# Altium PCB MPS_PSU_Eval.PcbDoc
Units mm, origin at the board's own origin, x right, y up, seen from the top; angles counter-clockwise.
Board outline 92 x 27 mm, 4 copper layers (Top Layer, Power/Sig, GND, Bottom Layer), stack 1.57 mm thick; 58 components, 31 nets, 158 pads, 508 vias.
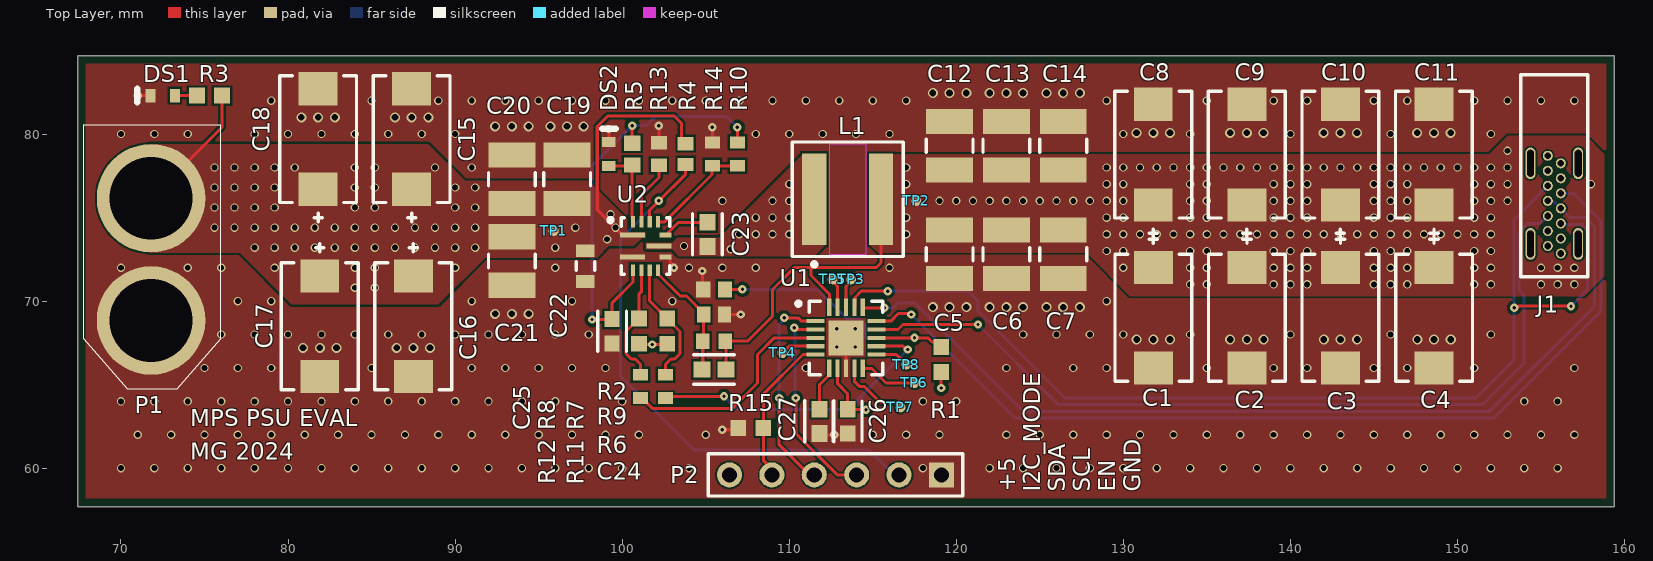
[diagram p0: Top Layer view]
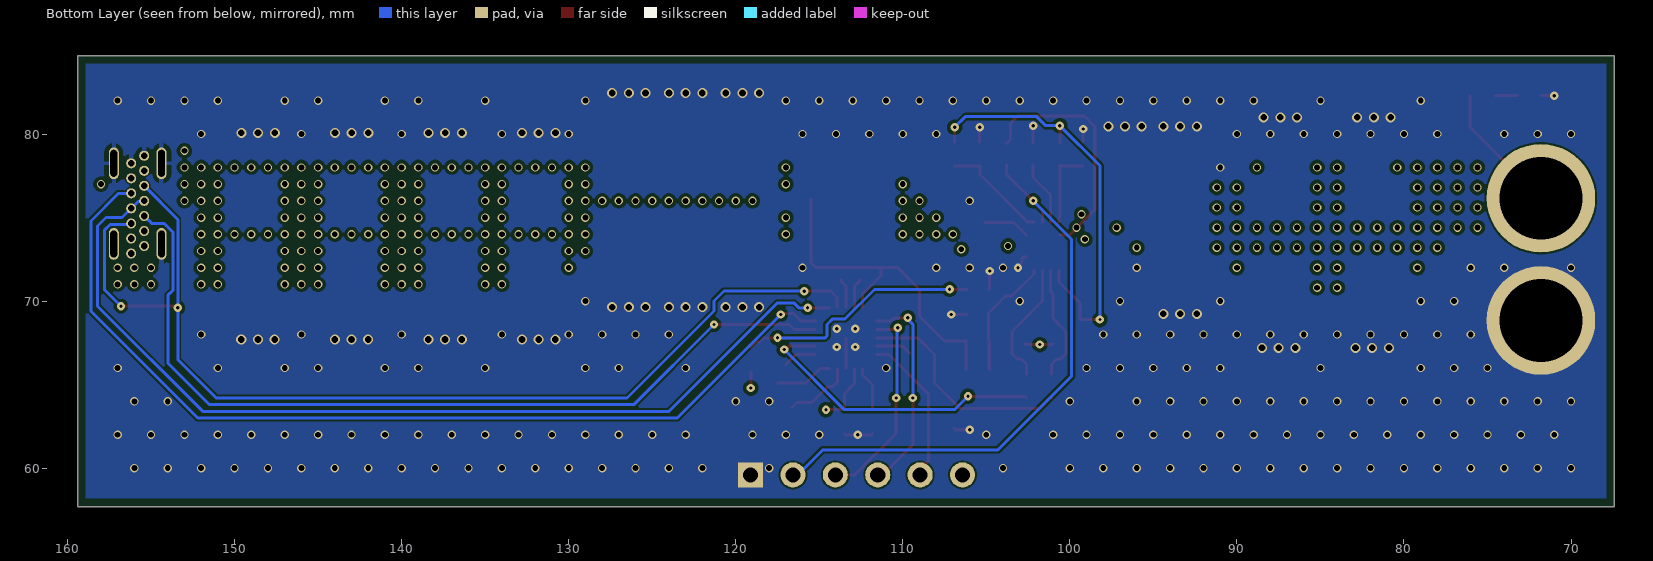
[diagram p1: Bottom Layer view, seen from below]
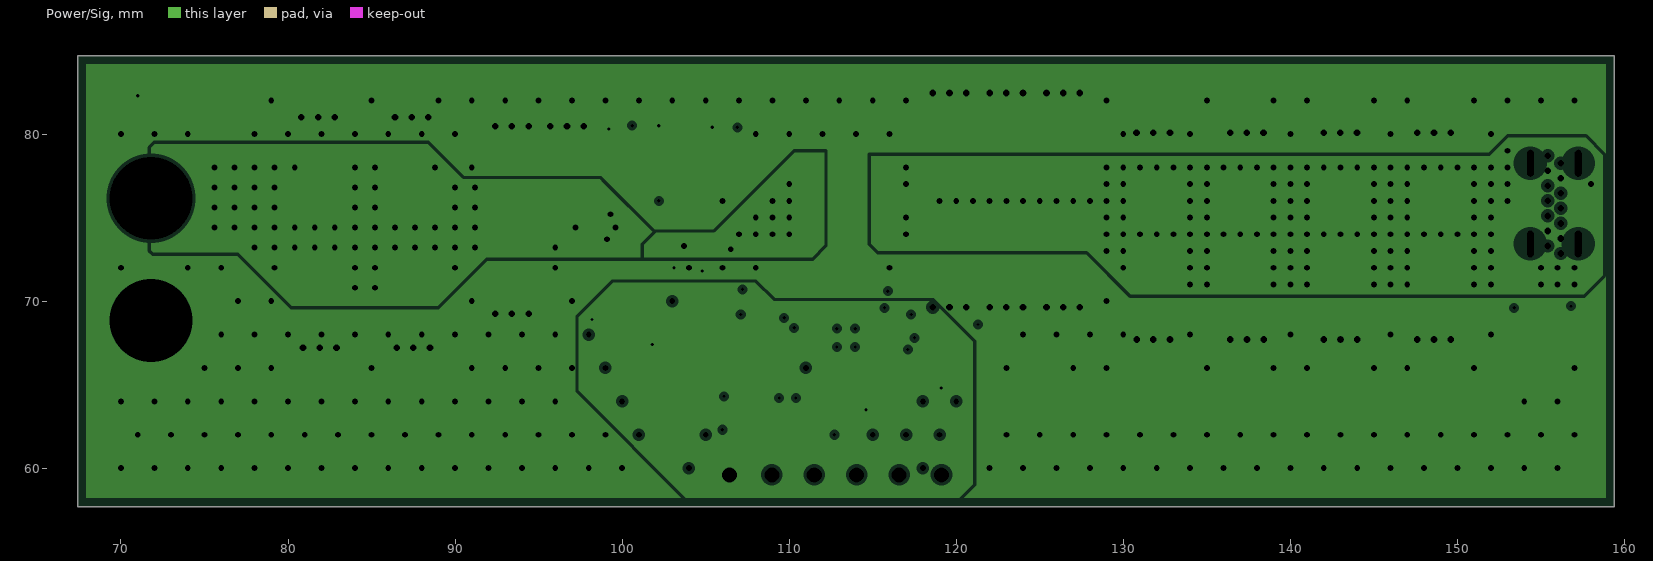
[diagram p2: Power/Sig, clearances drawn from the general rule]
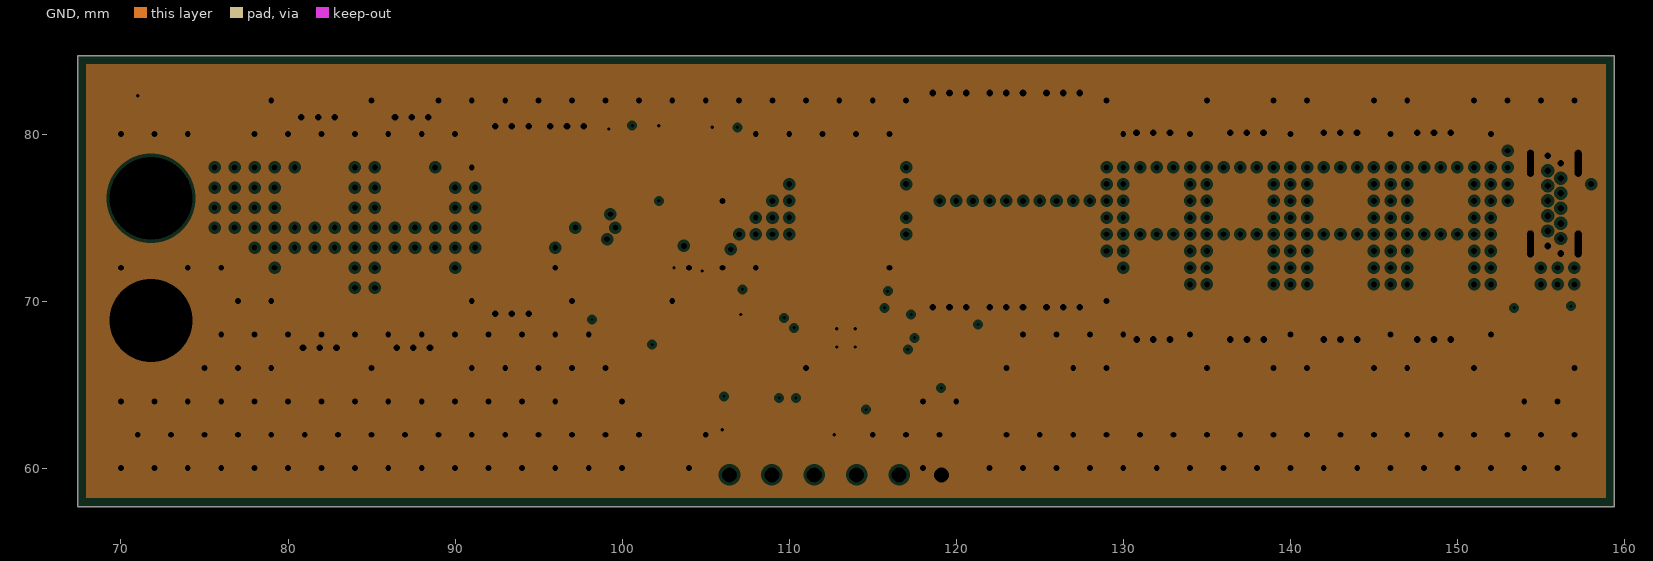
[diagram p3: GND, clearances drawn from the general rule]
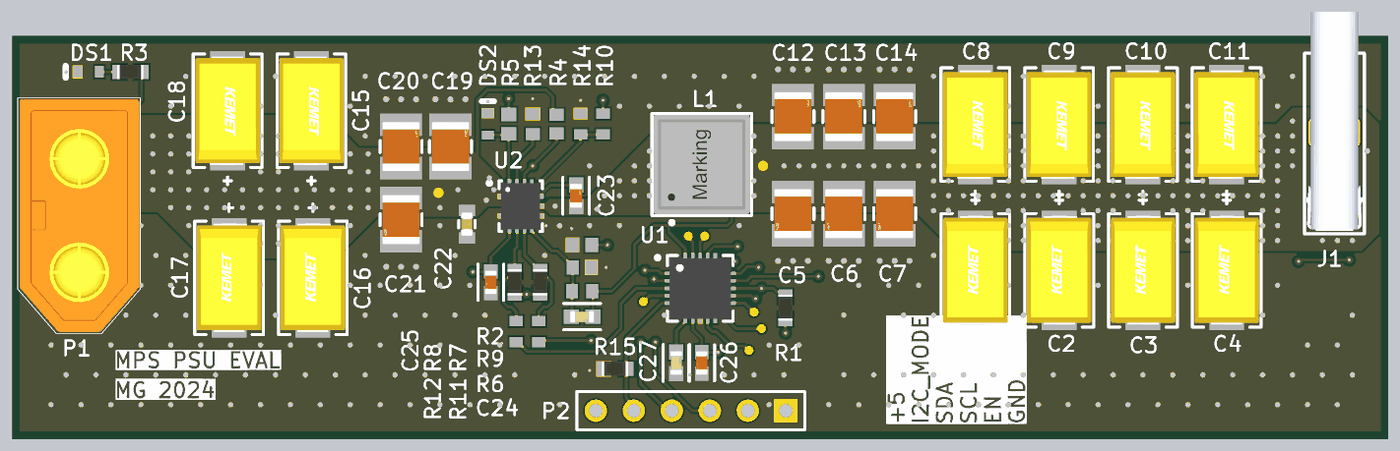
[diagram p4: 3D render of the assembled board from above, using the file's embedded part models]

## Layer stack, top to bottom
Top Solder: solder mask 0.0102, Solder Resist, Dk 3.5
Top Layer: signal copper 0.0356
Dielectric 2: prepreg 0.0994, PP-006, Dk 4.1
Power/Sig: plane copper 0.0175, net GND
Core 1: core 1.265, FR-4, Dk 4.8
GND: plane copper 0.0175, net GND
Dielectric 3: prepreg 0.0994, PP-006, Dk 4.1
Bottom Layer: signal copper 0.0356
Bottom Solder: solder mask 0.0102, Solder Resist, Dk 3.5

## Board outline
67.4,57.7 159.4,57.7 159.4,84.7 67.4,84.7

## Design rules (kind name [scope] priority, off if disabled: settings)
Clearance [All] p1: gap=0.127 ignorepadtopadclearanceinfootprint=FALSE except(0: SMDPad-Hole THPad-Hole Via-Hole Fill-Hole Poly-Hole Region-Hole Text-Hole; 0.1: Arc-Arc Arc-Track Track-Track THPad-Fill THPad-Poly THPad-Region; 0.2: Arc-SMDPad Arc-Via Track-SMDPad Track-Via Via-Fill Via-Poly Via-Region; 0.25: THPad-THPad; 0.254: Arc-Text Arc-Hole Track-Text Track-Hole SMDPad-THPad SMDPad-Via SMDPad-Text THPad-Via THPad-Text Via-Via Via-Text Fill-Text Poly-Text Region-Text Text-Text)
HoleSize [All] p1: absolutevalues=TRUE maxlimit=5 minlimit=0.025 maxpercent=80.000 minpercent=20.000
MinimumSolderMaskSliver [All] p1: minsoldermaskwidth=0.1
PlaneClearance [All] p1: clearance=0.2
PlaneConnect [All] p1: planeconnectstyle=Direct reliefexpansion=0.508 reliefentries=4 reliefconductorwidth=0.254 reliefairgap=0.254
PolygonConnect [All] p1: connectstyle=Direct reliefconductorwidth=0.254 reliefentries=4 polygonreliefangle="90 Angle" airgapwidth=0.254
RoutingVias [All] p1: holewidth=0.2 width=0.5 viastyle="Through Hole" minholewidth=0.2 minwidth=0.5 maxholewidth=0.711 maxwidth=1.27
SilkToSolderMaskClearance [IsPad] p1: minsilkscreentomaskgap=0.15 clearancetoexposedcopper=TRUE
SolderMaskExpansion SolderMaskExpansionVia [IsVia] p1: expansion=0.102 istentingtop=TRUE
SolderMaskExpansion [All] p2: expansion=0.04 istentingtop=FALSE
SupplyNets "Schematic Supply Nets_1" [InNet('GND')] p1: voltage=0.000
SupplyNets "Schematic Supply Nets" [InNet('+5')] p2: voltage=0.000
Width [All] p1: maxlimit=0.5 minlimit=0.127 preferedwidth=0.18 minimp=50.000000 maximp=50.000000 favimp=50.000000
25 further rules are at their usual default settings.

## Components (designator, comment, footprint, x,y, rotation, side; value= is the part's Value field where it differs from the comment)
C1 "47uF 35V" FP-T491X476K035AT-MFG 131.8,69 r90 top
C2 "47uF 35V" FP-T491X476K035AT-MFG 137.4,69 r90 top
C3 "47uF 35V" FP-T491X476K035AT-MFG 143,69 r90 top
C4 "47uF 35V" FP-T491X476K035AT-MFG 148.6,69 r90 top
C5 "10uF" FP-1210-L_3_3_0_4-W_2_5_0-IPC_B 119.6,72.8 r270 top
C6 "10uF" FP-1210-L_3_3_0_4-W_2_5_0-IPC_B 123,72.8 r270 top
C7 "10uF" FP-1210-L_3_3_0_4-W_2_5_0-IPC_B 126.4,72.8 r270 top
C8 "47uF 35V" FP-T491X476K035AT-MFG 131.794,78.771 r270 top
C9 "47uF 35V" FP-T491X476K035AT-MFG 137.394,78.771 r270 top
C10 "47uF 35V" FP-T491X476K035AT-MFG 142.994,78.771 r270 top
C11 "47uF 35V" FP-T491X476K035AT-MFG 148.594,78.771 r270 top
C12 "10uF" FP-1210-L_3_3_0_4-W_2_5_0-IPC_B 119.6,79.3 r90 top
C13 "10uF" FP-1210-L_3_3_0_4-W_2_5_0-IPC_B 123,79.3 r90 top
C14 "10uF" FP-1210-L_3_3_0_4-W_2_5_0-IPC_B 126.4,79.3 r90 top
C15 "47uF 35V" FP-T491X476K035AT-MFG 87.5,68.5 r90 top
C16 "47uF 35V" FP-T491X476K035AT-MFG 87.4,79.7 r270 top
C17 "47uF 35V" FP-T491X476K035AT-MFG 81.8,79.7 r270 top
C18 "47uF 35V" FP-T491X476K035AT-MFG 81.9,68.5 r90 top
C19 "10uF" FP-1210-L_3_3_0_4-W_2_5_0-IPC_B 96.7,77.3 r90 top
C20 "10uF" FP-1210-L_3_3_0_4-W_2_5_0-IPC_B 93.4,77.3 r90 top
C21 "10uF" FP-1210-L_3_3_0_4-W_2_5_0-IPC_B 93.4,72.4 r270 top
C22 "100nF" FP-CGA3E-0_3-0_1-IPC_B 97.8,72.1 r270 top
C23 "1uF" FP-0603-L_1_6_0_15-W_0_81-IPC_B 105.1,74 r90 top
C24 "22pF" FP-C0603C-CF-IPC_B 105.5,65.9 r180 top value="22 pF"
C25 "2.2uF" FP-GRM188-0_1-e0_2_0_5-IPC_B 99.4,68.2 r270 top
C26 "2.2uF" FP-GRM188-0_1-e0_2_0_5-IPC_B 113.5,62.8 r270 top
C27 "470nF" FP-C0603C-CF-IPC_B 111.8,62.8 r270 top value="0.47 μF"
DS1 "RED" VISH-TLMX1100_V 72.5,82.3 r180 top
DS2 "RED" VISH-TLMX1100_V 99.2,78.8 r90 top
J1 "UJ20-C-R-G-TH-P14" UJ20-C-R-G-TH-P14 155.8,78.7 r180 top
L1 "74439346056" WE-XHMI_6060_L6.65W6.45H5.8 113.5,76.1 r90 top
P1 "XT60" XT60 71.8,72.5 r270 top
P2 "Header 6" HDR1X6 119.12,59.6 r180 top
R1 "47k" RESC1608X55X30NL15T15#1 119.1,66.5 r270 top
R2 "10k NTC" RESC1608X90X30NL15T20 105.5,70.7 r0 top
R3 "10k" RESC1609X55X30NL15T15 75.3,82.3 r0 top
R4 "300k" RESC1609X50X30NL10T20 103.8,78.8 r90 top
R5 "2.2k" RESC1608X50X30NL20T20 100.6,78.8 r90 top
R6 "100k" RESC1608X55X30NL15T15#2 105.5,67.6 r0 top
R7 "10k" RESC1609X55X30NL15T15 102.7,68.2 r270 top
R8 "10k" RESC1609X55X30NL15T15 101,68.2 r270 top
R9 "11k" RESC1609X50X30NL10T20 105.5,69.2 r180 top
R10 "DNP" RESC1608X55X25NL10T15 106.9,78.8 r90 top
R11 "0R" RESC1608X55X25NL10T15 102.6,64.9 r270 top
R12 "0R" RESC1608X55X25NL10T15 101.1,64.9 r270 top
R13 "64.9k" RESC1608X55X30NL15T15#2 102.2,78.8 r270 top
R14 "0R" RESC1608X55X25NL10T15 105.4,78.8 r270 top
R15 "10k" RESC1609X55X30NL15T15 107.7,62.4 r0 top
TP1 "TESTPOINT" TESTPOINT_0.6 95.9,74.2 r90 top
TP2 "TESTPOINT" TESTPOINT_0.6 117.6,76 r90 top
TP3 "TESTPOINT" TESTPOINT_0.6 113.7,71.3 r90 top
TP4 "TESTPOINT" TESTPOINT_0.6 109.6,66.9 r90 top
TP5 "TESTPOINT" TESTPOINT_0.6 112.6,71.3 r90 top
TP6 "TESTPOINT" TESTPOINT_0.6 117.5,65.1 r90 top
TP7 "TESTPOINT" TESTPOINT_0.6 116.658,63.638 r90 top
TP8 "TESTPOINT" TESTPOINT_0.6 117,66.2 r90 top
U1 "MP5031" QFN-20-MP5031 113.4,67.8 r0 top
U2 "MP2491C" QFN-13-MPS2491C 101.4,73.3 r0 top

## Footprints (in the part's own frame and the unit in brackets; to place one, negate y for a bottom-side part, rotate by r counter-clockwise, add the part's x,y. Pads: shape width x height; smd on the part's side, far side on the other; paste and mask are expansions set on the pad)
FP-0603-L_1_6_0_15-W_0_81-IPC_B [mm]
  rect 1.007x0.968 smd paste+0 mask+0: 1(-0.726,0) 2(0.726,0)
  silkscreen extent -1.23,-0.88 1.23,0.88, body extent -1.48,-0.73 1.48,0.73, height 0.25
FP-1210-L_3_3_0_4-W_2_5_0-IPC_B [mm]
  rect 1.503x2.804 smd paste+0 mask+0: 1(-1.45,0) 2(1.45,0)
  silkscreen extent -0.4,-1.4 0.4,1.4, body extent -2.45,-1.65 2.45,1.65, height 0.25
FP-C0603C-CF-IPC_B [mm]
  rect 1.007x0.958 smd paste+0 mask+0: 1(-0.726,0) 2(0.726,0)
  silkscreen extent -1.23,-0.88 1.23,0.88, body extent -1.48,-0.73 1.48,0.73, height 0.25
FP-CGA3E-0_3-0_1-IPC_B [mm]
  rect 0.756x1.106 smd paste+0 mask+0: 1(-0.925,0) 2(0.925,0)
  silkscreen extent -0.25,-0.55 0.25,0.55, body extent -1.55,-0.8 1.55,0.8, height 0.25
FP-GRM188-0_1-e0_2_0_5-IPC_B [mm]
  rect 0.959x0.912 smd paste+0 mask+0: 1(-0.727,0) 2(0.727,0)
  silkscreen extent -1.21,-0.86 1.21,0.86, body extent -1.46,-0.71 1.46,0.71, height 0.25
FP-T491X476K035AT-MFG [mm]
  rect 1.99x2.33 smd paste+0 mask+0: 1(-3.01,0) 2(3.01,0)
  silkscreen extent -3.8,-2.3 4.95,2.3, body extent -4.13,-2.42 4.13,2.42, height 0.25
HDR1X6 [mm] "Connector; Header; 6 Position"
  rect 1.5x1.5 hole 0.9: 1(0,0)
  round 1.5 hole 0.9: 2(2.54,0) 3(5.08,0) 4(7.62,0) 5(10.16,0) 6(12.7,0)
  silkscreen extent -1.27,-1.27 13.97,1.27
QFN-13-MPS2491C [mm] "QFN, 14-Leads, Body 2,50x2,55mm, Pitch 0,50mm/0,65mm, IPC Medium Density"
  rect 1.5x0.3 smd: 1(-0.775,0.65) 2(-0.775,-0.65) 8(0.8,0)
  rect 0.25x0.7 smd: 3(-0.75,-1.45) 4(-0.25,-1.45) 5(0.25,-1.45) 6(0.75,-1.45) 10(0.75,1.45) 11(0.25,1.45) 12(-0.25,1.45) 13(-0.75,1.45)
  rect 0.7x0.3 smd: 7(1.2,-0.65) 9(1.2,0.65)
  silkscreen extent -2.22,-1.7 1.45,1.7, body extent -1.3,-1.55 1.3,1.55, height 1
QFN-20-MP5031 [mm] "QFN, 20-Leads, Body 4,00x4,00mm, Pitch 0,50mm, Thermal Pad 2,10x2,10mm, IPC Medium Density"
  rect 1.05x0.25 smd: 1(-1.825,1) 2(-1.825,0.5) 3(-1.825,0) 4(-1.825,-0.5) 5(-1.825,-1) 11(1.825,-1) 12(1.825,-0.5) 13(1.825,0) 14(1.825,0.5) 15(1.825,1)
  rect 0.25x1.05 smd: 6(-1,-1.825) 7(-0.5,-1.825) 8(0,-1.825) 9(0.5,-1.825) 10(1,-1.825) 16(1,1.825) 17(0.5,1.825) 18(0,1.825) 19(-0.5,1.825) 20(-1,1.825)
  rect 2.1x2.1 smd: 21(0,0)
  silkscreen extent -2.97,-2.2 2.2,2.2, body extent -2.05,-2.05 2.05,2.05, height 1
RESC1608X50X30NL20T20 [mm] "Chip Resistor, 2-Leads, Body 1.60x0.80mm, IPC Medium Density"
  rect 0.9x1 smd: 1(-0.65,0) 2(0.65,0)
  body extent -0.9,-0.5 0.9,0.5, height 0.5
RESC1608X55X25NL10T15 [mm] "Chip Resistor, 2-Leads, Body 1.70x0.90mm, IPC Medium Density"
  rect 0.7x0.9 smd: 1(-0.7,0) 2(0.7,0)
  body extent -0.85,-0.45 0.85,0.45, height 0.55
RESC1608X55X30NL15T15#1 [mm] "Chip Resistor, 2-Leads, Body 1.75x0.95mm, IPC Medium Density"
  rect 0.95x0.95 smd: 1(-0.75,0) 2(0.75,0)
  body extent -0.87,-0.48 0.87,0.48, height 0.55
RESC1608X55X30NL15T15#2 [mm] "Chip Resistor, 2-Leads, Body 1.60x0.80mm, IPC Medium Density"
  rect 0.8x0.95 smd: 1(-0.675,0) 2(0.675,0)
  body extent -0.87,-0.48 0.87,0.48, height 0.55
RESC1608X90X30NL15T20 [mm] "Chip Resistor, 2-Leads, Body 1.60x0.80mm, IPC Medium Density"
  rect 0.85x0.95 smd: 1(-0.65,0) 2(0.65,0)
  body extent -0.88,-0.48 0.87,0.48, height 0.9
RESC1609X50X30NL10T20 [mm] "Chip Resistor, 2-Leads, Body 1.55x0.85mm, IPC Medium Density"
  rect 0.8x0.95 smd: 1(-0.625,0) 2(0.625,0)
  body extent -0.82,-0.48 0.82,0.48, height 0.5
RESC1609X55X30NL15T15 [mm] "Chip Resistor, 2-Leads, Body 1.75x0.95mm, IPC Medium Density"
  rect 0.95x0.95 smd: 1(-0.75,0) 2(0.75,0)
  body extent -0.87,-0.48 0.87,0.48, height 0.55
TESTPOINT_0.6 [mm]
  round 0.6 smd paste-2539.97: 1(0,0)
UJ20-C-R-G-TH-P14 [mm]
  round 0.6 hole 0.4: A1(-0.39,0.45) A4(-0.39,1.35) A5(-0.39,2.25) A6(-0.39,3.15) A7(-0.39,4.05) A9(-0.39,4.95) A12(-0.39,5.85) B1(0.39,5.4) B4(0.39,4.5) B5(0.39,3.6) B6(0.39,2.7) B7(0.39,1.8) B9(0.39,0.9) B12(0.39,0)
  oval 0.6x1.9 hole 0.4 slot 1.6 at 90 deg: MP(-1.43,5.275) MP(-1.43,0.45) MP(1.43,5.275) MP(1.43,0.45)
  silkscreen extent -2,-4.85 2,7.25, body extent -1.88,-7.61 1.88,7.04, height 9.07
VISH-TLMX1100_V [mm] "SMD, 2-Leads, Body 1.6x0.8mm"
  rect 0.6x0.8 smd: 1(-0.725,0) 2(0.725,0)
  silkscreen extent 1.53,-0.4 1.53,0.4, body extent -0.8,-0.4 0.8,0.4, height 0.65
WE-XHMI_6060_L6.65W6.45H5.8 [mm] "SMT Power Inductor, 2-Leads, body 6.65x6.45mm"
  rect 5.5x1.45 smd: 1(0,2) 2(0,-2)
  Top Layer keep-out region: -3.325,1.075 3.325,1.075 3.325,-1.075 -3.325,-1.075
  silkscreen extent -4.02,-3.32 3.42,3.32, body extent -3.32,-3.22 3.33,3.23, height 5.8
XT60 [mm] "Battery Connector"
  round 6.5 hole 4.95: 1(-3.658,0) 2(3.658,0)
  silkscreen extent -8.05,-4.04 7.75,4.16, body extent -7.98,-3.91 7.62,4.09, height 16.4

## Part data
C1 C2 C3 C4 C8 C9 C10 C11 C15 C16 C17 C18: library part CMP-03017-000044-1, "CAP TANT 47UF 10% 35V 2917", Capacitance=47uF, Case Code (Imperial)=2917, Case Code (Metric)=7343, Dielectric Material=Tantalum, ESR (Equivalent Series Resistance)=600mR, Leakage Current=16.5uA, Max Operating Temperature=125°C, Min Operating Temperature=-55°C, Package Quantity=1, Ripple Current=524mA, Tolerance=10%, Voltage=35V, Case/Package=2917, Construction=Flat, Depth=4.3mm, Dissipation Factor=8%, Features="General Purpose", Height=4mm, Height - Seated (Max)=0.169inch, Lead Free="Lead Free", Length=7.3mm, Life (Hours)=2000Hour, Mount="Surface Mount", Number of Pins=2, Packaging="Tape and Reel", Polarity=Polar, Radiation Hardening=No, REACH SVHC="No SVHC", RoHS Compliant=Yes, Series=T491, Termination=SMD/SMT, Voltage Rating=35V, Voltage Rating (DC)=35V, Width=4.3mm
C5 C6 C7 C12 C13 C14 C19 C20 C21: library part CMP-2000-05477-2, "General Purpose Ceramic Capacitor, 1210, 10uF, 10%, X5R, 15%, 25V", Case Code (Imperial)=1210, Case Code (Metric)=3225, Dielectric=X5R, Max Operating Temperature=85°C, Min Operating Temperature=-55°C, Package Quantity=1, Tolerance=10%, Voltage=25V, Capacitance=10uF, Case/Package=1210, Construction=Flat, Contact Plating=Tin, Depth=2.5mm, Height=2.29mm, Lead Free="Lead Free", Length=3.2mm, Mount="Surface Mount", Packaging="Tape and Reel", Radiation Hardening=No, REACH SVHC="No SVHC", RoHS Compliant=Yes, Series=-, Termination=SMD/SMT, Thickness=0.11inch, Voltage Rating=25V, Voltage Rating (DC)=25V, Width=0.098inch
C22: library part CMP-2000-07546-2, "Cap Ceramic 100nF 50V X7R 10% Pad SMD 0603 +125°C Automotive T/R", Case Code (Imperial)=0603, Case Code (Metric)=1608, Dielectric=X7R, Max Operating Temperature=125°C, Min Operating Temperature=-55°C, Package Quantity=1, Ratings=AEC-Q200, Tolerance=10%, Voltage=50V, Capacitance=100nF, Case/Package=0603, Composition=Ceramic, Depth=0.8mm, Height=0.8mm, Lead Free="Lead Free", Length=1.6mm, Mount="Surface Mount", Packaging="Tape and Reel", Radiation Hardening=No, REACH SVHC="No SVHC", Termination=SMD/SMT, Thickness=0.035inch, Voltage Rating=50V, Voltage Rating (DC)=50V, Weight=7.1E-05oz, Width=0.8mm
C23: library part CMP-2006-04532-2, "General Purpose Ceramic Capacitor, 0603, 1uF, 10%, X5R, 15%, 16V", Case Code (Imperial)=0603, Case Code (Metric)=1608, Dielectric=X5R, Insulation Resistance=10GR, Max Operating Temperature=85°C, Min Operating Temperature=-55°C, Package Quantity=1, Tolerance=10%, Voltage=16V, Capacitance=1uF, Case/Package=0603, Construction=Flat, Depth=0.81mm, Dissipation Factor=12.5%, Height=0.9mm, Lead Free="Lead Free", Length=1.6mm, Mount="Surface Mount", Number of Pins=2, Packaging="Tape and Reel", Radiation Hardening=No, REACH SVHC="No SVHC", RoHS Compliant=Yes, Series=-, Termination=SMD/SMT, Thickness=0.035inch, Voltage Rating=16V, Voltage Rating (DC)=16V, Width=0.81mm
C24: library part CMP-2006-03119-3, "Cap Ceramic 22pF 50V C0G 5% SMD 0603 125°C Paper T/R", Capacitance="22 pF", Manufacturer=KEMET, Manufacturer Part Number=C0603C220J5GACTU, Package=C0603C-CF, Temperature="-55°C to +125°C", Temperature Characteristic=C0G, Temperature Coefficient=30ppm/°C, Temperature Range High=+125°C, Temperature Range Low=-55°C, Tolerance=0.05, Voltage Rating="50 V", Automotive=Yes, Automotive Grade="Grade 1", Category=Cap, ComponentLink2Description=Datasheet, ComponentLink2URL=https://api.kemet.com/component-edge/download/datasheet/C0603C100J5GACAUTO.pdf, Device Class L1="Passive Components", Device Class L2=Capacitors, Device Class L3="Ceramic Capacitors", Digikey Description="Cap Ceramic 22pF 50V C0G 5% SMD 0603 125°C Paper T/R", Height=0.87mm, Lead Free=Yes, Material=Ceramic, Mouser Description="Cap Ceramic 22pF 50V C0G 5% SMD 0603 125°C Paper T/R", Octopart=https://octopart.com/c0603c220j5gactu-kemet-98525, RoHS=TRUE
C25 C26: library part CMP-2006-02836-2, "Chip Multilayer Ceramic Capacitors for General Purpose, 0603, 2.2uF, X7R, 15%, 10%, 10V", Case Code (Imperial)=0603, Case Code (Metric)=1608, Dielectric=X7R, Max Operating Temperature=125°C, Min Operating Temperature=-55°C, Package Quantity=1, Tolerance=10%, Voltage=10V, Capacitance=2.2uF, Case/Package=0603, Depth=0.8mm, Height=0.8mm, Lead Free="Lead Free", Length=1.6mm, Material=Ceramic, Mount="Surface Mount", Number of Pins=2, Packaging="Cut Tape", REACH SVHC="No SVHC", Termination=SMD/SMT, Thickness=0.035inch, Voltage Rating=10V, Voltage Rating (DC)=10V, Weight=7.1E-05oz, Width=0.031inch
C27: library part CMP-2006-03235-2, "CAP CER 0.47UF 16V X7R 0603", Capacitance="0.47 μF", Manufacturer=KEMET, Manufacturer Part Number=C0603C474K4RACTU, Package=C0603C-CF, Temperature="-55°C to +125°C", Temperature Characteristic=X7R, Temperature Coefficient=30ppm/°C, Temperature Range High=+125°C, Temperature Range Low=-55°C, Tolerance=0.1, Voltage Rating="16 V", Automotive=Yes, Automotive Grade="Grade 1", Category=Cap, ComponentLink2Description=Datasheet, ComponentLink2URL=https://api.kemet.com/component-edge/download/datasheet/C0603C100J5GACAUTO.pdf, Device Class L1="Passive Components", Device Class L2=Capacitors, Device Class L3="Ceramic Capacitors", Digikey Description="CAP CER 0.47UF 16V X7R 0603", Height=0.87mm, Lead Free=Yes, Material=Ceramic, Mouser Description="0603 C 470nF Ceramic Multilayer Capacitor, 16 V, +125degC, X7R Dielec, +/-10%", Octopart=https://octopart.com/c0603c474k4ractu-kemet-109683, RoHS=TRUE
DS1 DS2: library part CMP-1666-00027-1, "LED, RED, 2.1 V, -40 to 100 degC, 2-Pin SMD (0603), RoHS, Tape and Reel", Capacitance="12 pF", Case Code (Imperial)=0603, Case Code (Metric)=1608, Max Operating Temperature=125degC, Min Operating Temperature=-55degC, Package Quantity=4000, Resistance="100000000000 Ohm", Tolerance=5%, Type (Capacitors)=C0G, Voltage Rating="50 V", Case/Package=0603, ComponentLink1Description="Manufacturer URL", ComponentLink1URL=http://www.vishay.com/, ComponentLink2Description=Datasheet, ComponentLink2URL=http://www.vishay.com/docs/83173/tlmb1100.pdf, DatasheetVersion="Rev. 2.7, 03/2016", Height="0.8 mm", Length="1.6 mm", Mount="Surface Mount", PackageDescription="2-Pin Surface Mount Device, Body 1.6 x 0.8 mm", PackageReference=TLMX1100, Packaging="Tape and Reel", Pins=2, Radiation Hardening=No, REACH SVHC="No SVHC", RoHSCompliant=True, Voltage Rating (DC)="50 V", Width="0.8 mm"
J1: library part "USB C"
L1: library part CMP-03913-75811201-1, "74439346056 Fixed Ind 5.6UH 6.9A 15MOHM SMD", Ambient Temperature Range High=85°C, Ambient Temperature Range Low=-40°C, Current Rating=6.9A, DC Resistance (DCR)=15mΩ, Inductance=5.6µH, Inductance Tolerance=20%, Max Operating Temperature=125°C, Saturation Current=5.8A, Height=6.1mm, Length=6.65mm, Min Operating Temperature=-40°C, Mount="Surface Mount", NexarPartId=75811201, Number of Pins=2, REACH SVHC="No SVHC", RMS Current (Irms)=6.9A, RoHS=Compliant, Width=6.45mm
P2: "Header, 6-Pin", LatestRevisionDate=17-Jul-2002, LatestRevisionNote="Re-released for DXP Platform.", Publisher="Altium Limited"
R1: library part CMP-2000-00523-2, "Chip Resistor, 47 KOhm, +/- 1%, 0.1 W, -55 to 155 degC, 0603 (1608 Metric), RoHS, Tape and Reel", Case Code (Imperial)=0603, Case Code (Metric)=1608, Colour=Red, Forward Current="20 mA", Forward Voltage="2.1 V", Max Operating Temperature="100 degC", Min Operating Temperature="-40 degC", Package Quantity=3000, Power Rating="90 mW", Case\Package=0603, ComponentLink1Description="Manufacturer URL", ComponentLink1URL=http://www.panasonic.com/, ComponentLink2Description=Datasheet, ComponentLink2URL=http://industrial.panasonic.com/cdbs/www-data/pdf/RDA0000/AOA0000C86.pdf, DatasheetVersion=Apr-15, Height="0.6 mm", Illumination Colour=Red, Length="1.6 mm", Lens Style=Clear, Luminous Intensity="63 mcd", Mount="Surface Mount", Nominal Vf="2.1 V", Nominal Wavelength="639 nm", PackageDescription="2-Pin Surface Mount Device, Body 1.6 x 0.85 mm", PackageReference=0603, Packaging="Tape and Reel", Pins=2, Radiation Hardening=No, REACH SVHC="No SVHC", RoHSCompliant=true, Viewing Angle="160 degrees", Width="0.8 mm"
R2: library part CMP-2000-00869-1, Manufacturer=Panasonic, Part Number=ERT-J1VR103J
R3 R7 R8 R15: library part CMP-1012-00623-3, "Chip Resistor, 10 KOhm, +/- 1%, 0.1 W, -55 to 155 degC, 0603 (1608 Metric), RoHS, Tape and Reel", Case Code (Imperial)=0603, Case Code (Metric)=1608, Manufacturer=Panasonic, Max Operating Temperature=155degC, Max Power Dissipation=100mW, Min Operating Temperature=-55degC, Package Description="2-Pin Surface Mount Device, Body 1.6 x 0.85 mm", Package Quantity=1, Package Reference=603, Resistance=10KOhm, Temperature Coefficient=100ppm\/degreesC, Tolerance=1%, Voltage Rating=75V, Case\/Package=0603, Composition=ThickFilm, Contact Plating=Tin, Datasheet URL=https://industrial.panasonic.com/cdbs/www-data/pdf/RDA0000/AOA0000C304.pdf, Datasheet Version=02/2017, Depth=0.8mm, Height=0.45mm, Lead Free=LeadFree, Length=1.6mm, Manufacturer URL=http://www.panasonic.com/, Military Standard=Not, Mount=SurfaceMount, Mounting Technology=SurfaceMount, Number of Pins=2, Number of Terminations=2, Packaging=TapeandReel, Power Rating=100mW, Radiation Hardening=No, REACH SVHC=NoSVHC, RoHSCompliant=true, Termination=SMD/SMT, Voltage Rating (DC)=75V, Width=0.031inch
R4: library part CMP-2000-03214-1, Manufacturer="Vishay Dale", Part Number=CRCW0603300KFKEA
R5: library part CMP-2000-02545-1, Manufacturer=Susumu, Part Number=RR0816P-223-B-T5
R6: library part CMP-2000-00182-1, Manufacturer=Panasonic, Part Number=ERJ-3EKF1003V
R9: library part CMP-2000-03860-1, Manufacturer="Vishay Dale", Part Number=CRCW060311K0FKEA
R10 R11 R12 R14: library part CMP-2100-03667-1, "Chip Resistor, 0 Ohm, +/- 5%, 0.1 W, -55 to 155 degC, 0603 (1608 Metric), RoHS, Tape and Reel", Case Code (Imperial)=0603, Case Code (Metric)=1608, Manufacturer=Yageo, Max Operating Temperature=155degC, Min Operating Temperature=-55degC, Package Description="2-Pin Surface Mount Device, Body 1.6 x 0.8 mm", Package Quantity=5000, Power Rating=100mW, Resistance=0mOhm, Temperature Coefficient=200ppm/degreesC, Tolerance=5%, Voltage Rating=50V, Case/Package=0603, Composition=ThickFilm, Contact Plating=Tin, Datasheet URL=http://www.yageo.com/NewPortal/yageodocoutput?fileName=/pdf/R-Chip/PYu-RC_Group_51_RoHS_L_5.pdf, Datasheet Version="Rev. 5, 10/2016", Depth=0.8mm, Height=0.45mm, Lead Free=LeadFree, Length=1.6mm, Manufacturer URL=http://www.yageo.com/, Military Standard=Not, Number of Pins=2, Package Reference=0603, Packaging=TapeandReel, Radiation Hardening=No, REACH SVHC=NoSVHC, RoHSCompliant=true, Termination=SMD/SMT, Voltage Rating (DC)=50V, Width=0.8mm
R13: library part CMP-2000-00605-1, Manufacturer=Panasonic, Part Number=ERJ-3EKF6492V

## Via types
v1: diameter 0.5, hole 0.35, Top Layer to Bottom Layer, tented both sides, 411 vias
v2: diameter 0.6, hole 0.4, Top Layer to Bottom Layer, tented both sides, 63 vias
v3: diameter 0.5, hole 0.2, Top Layer to Bottom Layer, tented both sides, 34 vias

## Nets (pads, with @x,y where several pads share a name; then routed paths per layer and width w, separated by ;. In a path a pad name is that pad's centre, name@x,y a point inside that pad or via, vN(x,y) a via of type N, cw(c..) or ccw(c..) an arc to the next point about the centre after c; other vN are vias at no path point)
+5: C25.1 C26.1 P2.6 R1.2 R5.2 R7.2 R8.2 R10.2 U1.7 U2.3 | length 32.5
  Top Layer w0.18: v3(98.2,68.9) 99.373,68.9 C25.1 99.4,69.9 100.65,71.15 U2.3 ; R5.2 v3(100.6,80.5) ; R8.2 101.05,67.4 v3(101.8,67.4) 102.65,67.4 R7.2 ; R10.2 v3(106.9,80.4) ; U1.7 112.9,65.046 113.5,64.446 C26.1 113.527,63.5 v3(114.6,63.5) ; v3(119.1,64.8) R1.2
  Bottom Layer w0.18: v3(98.2,68.9) 98.2,78.1 v3(100.6,80.5) 101.436,80.5 101.976,81.04 106.26,81.04 v3(106.9,80.4)
CC1: J1.A5 U1.15 | length 57.3
  Top Layer w0.18: U1.15 116.078,68.8 116.532,69.254 117.246,69.254 v3(117.3,69.2)
  Bottom Layer w0.18: v3(117.3,69.2) 123.5,63 152.2,63 158.6,69.4 158.6,74.8 156.95,76.45 J1.A5
CC2: J1.B5 U1.14 | length 52
  Top Layer w0.18: U1.14 116.513,68.3 116.813,68.6 v3(121.3,68.6)
  Bottom Layer w0.18: v3(121.3,68.6) 126.1,63.8 151.5,63.8 153.994,66.294 153.994,70.346 153.7,70.64 153.7,74.136 154.218,74.654 154.964,74.654 J1.B5
DN: J1.A7 J1.B7 U1.17 | length 65.6
  Top Layer w0.18: U1.17 113.935,69.66 113.935,70.22 114.315,70.6 v3(115.9,70.6) ; v3(153.4,69.6) 153.461,69.661 153.627,69.661 153.665,69.7 v3(156.8,69.7)
  Bottom Layer w0.18: v3(115.9,70.6) 120.7,70.6 121.3,70 121.3,69.405 126.505,64.2 151.1,64.2 153.4,66.5 153.4,74.89 J1.B7 ; J1.A7 156.248,74.592 157.444,74.592 157.8,74.236 157.8,70.7 v3(156.8,69.7)
DP: J1.A6 J1.B6 U1.16 | length 57.4
  Top Layer w0.18: U1.16 114.425,69.6 v3(115.7,69.6)
  Bottom Layer w0.18: v3(115.7,69.6) 116.224,69.6 116.524,69.9 117.5,69.9 124,63.4 151.9,63.4 158.2,69.7 158.2,74.5 157.7,75 156.74,75 J1.A6 155.787,75.953 155.457,75.953 J1.B6
EN: P2.2 R4.1 U2.11 | length 34.9
  Top Layer w0.18: U2.11 101.65,75.45 v3(102.2,76) 103.8,77.6 R4.1
  Bottom Layer w0.18: v3(102.2,76) 99.9,73.7 99.9,65.5 104.3,61.1 114.78,61.1 116.28,59.6 P2.2
GND: C1.1 C2.1 C3.1 C4.1 C5.2 C6.2 C7.2 C8.1 C9.1 C10.1 C11.1 C12.2 C13.2 C14.2 C15.1 C16.1 C17.1 C18.1 C19.2 C20.2 C21.2 C22.2 C25.2 C26.2 C27.2 DS1.2 DS2.2 J1.A1 J1.A12 J1.B1 J1.B12 J1.MP P1.2 P2.1 R2.1 R9.1 R13.1 R14.1 R15.1 U1.8 U1.21 U2.2 U2.7 | length 11.1
  Top Layer w0.18: v3(71,82.3) DS1.2 ; DS2.2 v3(99.2,80.3) ; R13.1 v3(102.2,80.5) ; U2.7 102.8,72.65 102.86,72.59 102.86,72.327 103.1,72.087 v3(103.1,72) ; v3(104.8,71.8) 104.8,70.75 R2.1 ; R14.1 v3(105.4,80.4) ; v3(106,62.3) 106.85,62.3 R15.1 ; R9.1 v3(107.1,69.2) ; C27.2 111.874,62 v3(112.7,62) 113.427,62 C26.2 ; U1.8 U1.21
  other v1: 70,60 72,60 74,60 76,60 78,60 80,60 82,60 84,60 86,60 88,60 90,60 92,60 94,60 96,60 98,60 100,60 104,60 118,60 122,60 124,60 126,60 128,60 130,60 132,60 134,60 136,60 138,60 140,60 142,60 144,60 146,60 148,60 150,60 152,60 154,60 156,60 71,62 73,62 75,62 77,62 79,62 81,62 83,62 85,62 87,62 89,62 91,62 93,62 95,62 97,62 99,62 101,62 105,62 115,62 117,62 119,62 123,62 125,62 127,62 129,62 131,62 133,62 135,62 137,62 139,62 141,62 143,62 145,62 147,62 149,62 151,62 153,62 155,62 157,62 70,64 72,64 74,64 76,64 78,64 80,64 82,64 84,64 86,64 88,64 90,64 92,64 94,64 96,64 100,64 118,64 120,64 154,64 156,64 75,66 77,66 79,66 85,66 91,66 93,66 95,66 97,66 99,66 111,66 123,66 127,66 129,66 135,66 139,66 141,66 145,66 147,66 151,66 157,66 76,68 78,68 80,68 82,68 84,68 86,68 88,68 90,68 92,68 94,68 96,68 98,68 124,68 126,68 128,68 130,68 134,68 140,68 146,68 152,68 77,70 79,70 91,70 97,70 103,70 129,70 70,72 74,72 76,72 96,72 104,72 106,72 108,72 116,72 106,76 91,78 70,80 72,80 74,80 78,80 80,80 82,80 84,80 86,80 88,80 90,80 108,80 110,80 112,80 114,80 116,80 130,80 134,80 140,80 146,80 152,80 79,82 85,82 89,82 91,82 93,82 95,82 97,82 99,82 101,82 103,82 105,82 107,82 109,82 111,82 113,82 115,82 117,82 129,82 135,82 139,82 141,82 145,82 147,82 151,82 153,82 155,82 157,82
  other v2: 80.9,67.2 81.9,67.2 82.9,67.2 86.5,67.2 87.5,67.2 88.5,67.2 130.8,67.7 131.8,67.7 132.8,67.7 136.4,67.7 137.4,67.7 138.4,67.7 142,67.7 143,67.7 144,67.7 147.6,67.7 148.6,67.7 149.6,67.7 92.4,69.24 93.4,69.24 94.4,69.24 118.6,69.64 119.6,69.64 120.6,69.64 122,69.64 123,69.64 124,69.64 125.4,69.64 126.4,69.64 127.4,69.64 130.794,80.071 131.794,80.071 132.794,80.071 136.394,80.071 137.394,80.071 138.394,80.071 141.994,80.071 142.994,80.071 143.994,80.071 147.594,80.071 148.594,80.071 149.594,80.071 92.4,80.46 93.4,80.46 94.4,80.46 95.7,80.46 96.7,80.46 97.7,80.46 80.8,81 81.8,81 82.8,81 86.4,81 87.4,81 88.4,81 118.6,82.46 119.6,82.46 120.6,82.46 122,82.46 123,82.46 124,82.46 125.4,82.46 126.4,82.46 127.4,82.46
  other v3: 112.85,67.25 113.95,67.25 112.85,68.35 113.95,68.35
NetC15_2: C15.2 C16.2 C17.2 C18.2 C19.1 C20.1 C21.1 C22.1 P1.1 R3.2 R4.2 TP1.1 U2.1 | length 22.4
  Top Layer w0.18: P1.1 76.05,80.407 R3.2 ; U2.1 100.025,73.95 98.51,75.465 98.51,80.45 99.154,81.094 103.106,81.094 103.55,80.65 103.55,79.675 R4.2
  other v1: 84,70.8 85.2,70.8 79.2,72 84,72 85.2,72 90,72 78,73.2 79.2,73.2 80.4,73.2 81.6,73.2 82.8,73.2 84,73.2 85.2,73.2 86.4,73.2 87.6,73.2 88.8,73.2 90,73.2 91.2,73.2 96,73.2 99.1,73.7 75.6,74.4 76.8,74.4 78,74.4 79.2,74.4 80.4,74.4 81.6,74.4 82.8,74.4 84,74.4 85.2,74.4 86.4,74.4 87.6,74.4 88.8,74.4 90,74.4 91.2,74.4 97.2,74.4 99.6,74.4 99.3,75.2 75.6,75.6 76.8,75.6 78,75.6 79.2,75.6 84,75.6 85.2,75.6 90,75.6 91.2,75.6 75.6,76.8 76.8,76.8 78,76.8 79.2,76.8 84,76.8 85.2,76.8 90,76.8 91.2,76.8 75.6,78 76.8,78 78,78 79.2,78 80.4,78 84,78 85.2,78 88.8,78
NetC23_1: C23.1 L1.1 U2.8
  other v1: 106.5,73.1 103.7,73.3 107,74 108,74 109,74 110,74 108,75 109,75 110,75 109,76 110,76 110,77
NetC23_2: C23.2 U2.9 | length 2.8
  Top Layer w0.18: U2.9 103.357,74.707 105.081,74.707 C23.2
NetC24_2: C24.2 R6.1 R9.2 U2.6 | length 7.3
  Top Layer w0.18: U2.6 102.15,71.625 103.475,70.3 103.85,70.3 104.875,69.275 R9.2 104.875,67.65 R6.1 104.825,65.951 C24.2
NetC27_1: C27.1 U1.6 | length 2.7
  Top Layer w0.18: C27.1 111.8,64.975 112.4,65.575 U1.6
NetDS1_1: DS1.1 R3.1 | length 1.3
  Top Layer w0.18: DS1.1 R3.1
NetDS2_1: DS2.1 R5.1 U2.13 | length 4.9
  Top Layer w0.18: DS2.1 100.525,78.075 R5.1 100.6,75.025 100.65,74.975 U2.13
NetP2_3: P2.3 U1.2 | length 12.3
  Top Layer w0.18: v3(110.3,68.4) 110.387,68.4 110.487,68.3 U1.2 ; v3(110.4,64.2) 110.4,62.082 112.882,59.6 P2.3
  Bottom Layer w0.18: v3(110.3,68.4) 110.35,68.35 110.35,64.25 v3(110.4,64.2)
NetP2_4: P2.4 U1.1 | length 12.5
  Top Layer w0.18: v3(109.4,64.2) 109.4,61.4 111.2,59.6 P2.4 ; v3(109.7,69) 110.54,69 110.74,68.8 U1.1
  Bottom Layer w0.18: v3(109.4,64.2) 109.4,68.613 109.7,68.913 v3(109.7,69)
NetP2_5: P2.5 R15.2 U1.5 | length 9.1
  Top Layer w0.18: P2.5 108.96,59.957 108.45,60.467 R15.2 108.45,64.425 110.825,66.8 U1.5
NetR10_1: R10.1 R14.2 U2.10 | length 6.4
  Top Layer w0.18: U2.10 102.55,74.75 105.385,77.585 105.385,78.085 R14.2 R10.1
NetR11_2: R11.2 U1.12 | length 18.3
  Top Layer w0.18: R11.2 102.7,64.3 v3(106.1,64.3) ; U1.12 116.813,67.3 117.013,67.1 v3(117.1,67.1)
  Bottom Layer w0.18: v3(106.1,64.3) 106.9,63.5 113.5,63.5 v3(117.1,67.1)
NetR12_2: R12.2 U1.3 | length 13.5
  Top Layer w0.18: R12.2 101.2,64.2 101.84,63.56 106.56,63.56 108.1,65.1 108.1,66.8 109.1,67.8 U1.3
NetR13_2: R13.2 U2.12 | length 3.8
  Top Layer w0.18: U2.12 101.15,76.35 102.2,77.4 R13.2
NetTP3_1: TP3.1 U1.18 | length 1.8
  Top Layer w0.18: U1.18 113.4,70.886 113.7,71.186 TP3.1
NetTP4_1: TP4.1 U1.4 | length 2.1
  Top Layer w0.18: TP4.1 109.606,66.9 110.006,67.3 U1.4
NetTP5_1: TP5.1 U1.19 | length 1.8
  Top Layer w0.18: TP5.1 112.6,71.186 112.9,70.886 U1.19
NetTP6_1: TP6.1 U1.10 | length 3.5
  Top Layer w0.18: U1.10 114.925,65.975 115.8,65.1 TP6.1
NetTP7_1: TP7.1 U1.9 | length 4.2
  Top Layer w0.18: U1.9 113.9,65.2 114.2,64.9 114.481,64.9 115.456,63.924 116.343,63.924 116.629,63.638 TP7.1
NetTP8_1: TP8.1 U1.11 | length 2
  Top Layer w0.18: U1.11 116.4,66.8 TP8.1
NTC: R1.1 R2.2 U1.13 | length 17.1
  Top Layer w0.18: R2.2 v3(107.2,70.7) ; U1.13 v3(117.5,67.8) 118.3,67.8 118.55,67.55 118.8,67.55 R1.1
  Bottom Layer w0.18: v3(107.2,70.7) 111.7,70.7 113.456,68.944 114.196,68.944 114.544,68.596 114.544,67.905 114.649,67.8 v3(117.5,67.8)
VBUS: C1.2 C2.2 C3.2 C4.2 C5.1 C6.1 C7.1 C8.2 C9.2 C10.2 C11.2 C12.1 C13.1 C14.1 C24.1 J1.A4 J1.A9 J1.B4 J1.B9 L1.2 R6.2 TP2.1 U1.20 | length 20.5
  Top Layer w0.18: C24.1 106.226,67.549 R6.2 107.5,67.6 109,69.1 109,70.7 110.3,72 115.2,72 115.5,72.3 L1.2 ; 111.3,71.9 111.3,71.53 112.4,70.43 U1.20
  other v1: 134,71 135,71 139,71 140,71 141,71 145,71 146,71 147,71 151,71 152,71 155,71 156,71 157,71 130,72 134,72 135,72 139,72 140,72 141,72 145,72 146,72 147,72 151,72 152,72 155,72 156,72 157,72 129,73 130,73 134,73 135,73 139,73 140,73 141,73 145,73 146,73 147,73 151,73 152,73 117,74 129,74 130,74 131,74 132,74 133,74 134,74 135,74 136,74 137,74 138,74 139,74 140,74 141,74 142,74 143,74 144,74 145,74 146,74 147,74 148,74 149,74 150,74 151,74 152,74 117,75 129,75 130,75 134,75 135,75 139,75 140,75 141,75 145,75 146,75 147,75 151,75 152,75 119,76 120,76 121,76 122,76 123,76 124,76 125,76 126,76 127,76 128,76 129,76 130,76 134,76 135,76 139,76 140,76 141,76 145,76 146,76 147,76 151,76 152,76 153,76 117,77 129,77 130,77 134,77 135,77 139,77 140,77 141,77 145,77 146,77 147,77 151,77 152,77 153,77 158,77 117,78 129,78 130,78 131,78 132,78 133,78 134,78 135,78 136,78 137,78 138,78 139,78 140,78 141,78 142,78 143,78 144,78 145,78 146,78 147,78 148,78 149,78 150,78 151,78 152,78 153,78 153,79
VSEL1: R8.1 R12.1 U2.4 | length 7.1
  Top Layer w0.18: R12.1 101.1,66.22 100.783,66.537 100.552,66.537 100.235,66.855 100.235,68.185 R8.1 101,70.405 101.15,70.555 U2.4
VSEL2: R7.1 R11.1 U2.5 | length 7.5
  Top Layer w0.18: U2.5 101.65,70 R7.1 103.465,68.185 103.465,66.855 103.148,66.537 102.917,66.537 102.6,66.22 R11.1

## Polygon pours and split planes (outlines as drawn)
GND on Top Layer "NONET_L-01_P-001" (solid, pour order 3): 67.9,58.2 158.9,58.2 158.9,84.2 67.9,84.2
VBUS on Top Layer "NONET_L-01_P-001" (solid, pour order 2): 114.8,78.8 151.9,78.8 153,79.9 157.7,79.9 158.8,78.8 158.8,71.5 157.6,70.3 130.4,70.3 127.8,72.9 115.3,72.9 114.8,73.4
NetC23_1 on Top Layer "NONET_L-01_P-001" (solid, pour order 1): 101.4,73.5 103,73.5 103.3,73.8 105.8,73.8 110.8,78.8 112.2,78.8 112.2,73.4 111.5,72.7 103.4,72.7 103,73.1 101.4,73.1
NetC15_2 on Top Layer "NONET_L-01_P-001" (solid, pour order 0): 71.1,78.8 71.7,79.4 88.4,79.4 90.6,77.2 98,77.2 100.3,74.9 100.3,74.1 101.4,74.1 101.4,73.8 101.2,73.8 100.7,73.3 99.2,73.3 98.5,72.6 91.8,72.6 89,69.8 80.2,69.8 77.1,72.9 71.7,72.9 71.1,73.5
GND on Bottom Layer "NONET_L-01_P-001" (solid, pour order 4): 67.9,58.2 158.9,58.2 158.9,84.2 67.9,84.2
GND on GND (split plane): 158.89,58.21 67.91,58.21 67.91,84.19 158.89,84.19
GND on Power/Sig (split plane): 158.89,78.846 158.872,78.872 157.772,79.972 157.739,79.994 157.7,80.002 153,80.002 152.961,79.994 152.928,79.972 151.858,78.902 114.8,78.902 114.761,78.894 114.728,78.872 114.706,78.839 114.698,78.8 114.698,73.4 114.706,73.361 114.728,73.328 115.228,72.828 115.261,72.806 115.3,72.798 127.758,72.798 130.328,70.228 130.361,70.206 130.4,70.198 157.6,70.198 157.639,70.206 157.672,70.228 158.872,71.428 158.89,71.454 158.89,58.21 120.455,58.21 121.172,58.928 121.194,58.961 121.202,59 121.202,67.6 121.194,67.639 121.172,67.672 118.672,70.172 118.639,70.194 118.6,70.202 109.142,70.202 108.072,71.272 108.039,71.294 108,71.302 99.4,71.302 99.361,71.294 99.328,71.272 97.228,69.172 97.206,69.139 97.198,69.1 97.198,64.6 97.206,64.561 97.228,64.528 103.545,58.21 67.91,58.21 67.91,84.19 158.89,84.19
NetC15_2 on Power/Sig (split plane): 89.128,78.628 90.428,77.328 90.461,77.306 90.5,77.298 98.658,77.298 98.928,77.028 101.806,74.15 101.128,73.472 101.106,73.439 101.098,73.4 101.098,73.2 101.098,72.602 91.9,72.602 91.861,72.594 91.828,72.572 89.828,70.572 88.958,69.702 80.242,69.702 77.072,72.872 77.039,72.894 77,72.902 71.942,72.902 71.802,73.042 71.802,79.158 72.042,79.398 88.358,79.398
+5 on Power/Sig (split plane): 109.028,70.028 109.061,70.006 109.1,69.998 118.558,69.998 120.998,67.558 120.998,59.042 120.166,58.21 103.834,58.21 97.402,64.642 97.402,69.058 99.442,71.098 107.958,71.098
NetC23_1 on Power/Sig (split plane): 112.098,73.342 111.358,72.602 101.302,72.602 101.302,73.2 101.302,73.358 102.042,74.098 105.5,74.098 105.539,74.106 105.572,74.128 110.342,78.898 112.098,78.898
VBUS on Power/Sig (split plane): 158.698,78.758 158.698,71.542 157.558,70.402 130.442,70.402 127.872,72.972 127.839,72.994 127.8,73.002 115.342,73.002 114.902,73.442 114.902,78.698 151.9,78.698 151.939,78.706 151.972,78.728 153.042,79.798 157.658,79.798

## Other copper
Power/Sig (plane layer: these items are gaps in the copper):
  lines w0.2: 101.2,72.5 101.2,73.2 101.2,73.4 102,74.2 ; 99.4,71.2 97.3,69.1 97.3,64.6 104,57.9 120,57.9 121.1,59 121.1,67.6 118.6,70.1 109.1,70.1 108,71.2 99.4,71.2 ; 99.4,71.2 99.4,71.2 ; 102,74.2 101.9,74.2 99,77.1 98.7,77.4 95.7,77.4 90.5,77.4 89.2,78.7 88.4,79.5 83.9,79.5 72,79.5 71.7,79.2 71.7,73 71.9,72.8 77,72.8 80.2,69.6 82.5,69.6 89,69.6 89.9,70.5 91.9,72.5 100.5,72.5 111.4,72.5 112.2,73.3 112.2,79 110.3,79 105.5,74.2 102,74.2 ; 114.8,73.4 114.8,78.8 151.9,78.8 153,79.9 157.7,79.9 158.8,78.8 158.8,71.5 157.6,70.3 130.4,70.3 127.8,72.9 115.3,72.9 114.8,73.4

## Silkscreen, mask and mechanical layers (free items; w line width, h text height)
Top Overlay:
  text "MPS PSU EVAL" at 74.15,62.5 h1
  text "MG 2024" at 74.15,60.5 h1
  text "+5 / I2C_MODE / SDA / SCL / EN / GND" at 131.032,58.6 h1 r90
Mechanical 1:
  the board outline again, w0.2

## Dimensions
159.4,57.7 to 159.4,84.7 on Mechanical 1
67.4,84.7 to 159.4,84.7 on Mechanical 1

## Text inside footprints (layer, text, board x,y; h text height)
J1: Mechanical 1 "PCB edge" at 153.516,83.567 h0.2 r180